# EAGLE board power_layout (EAGLE 9.6.2)
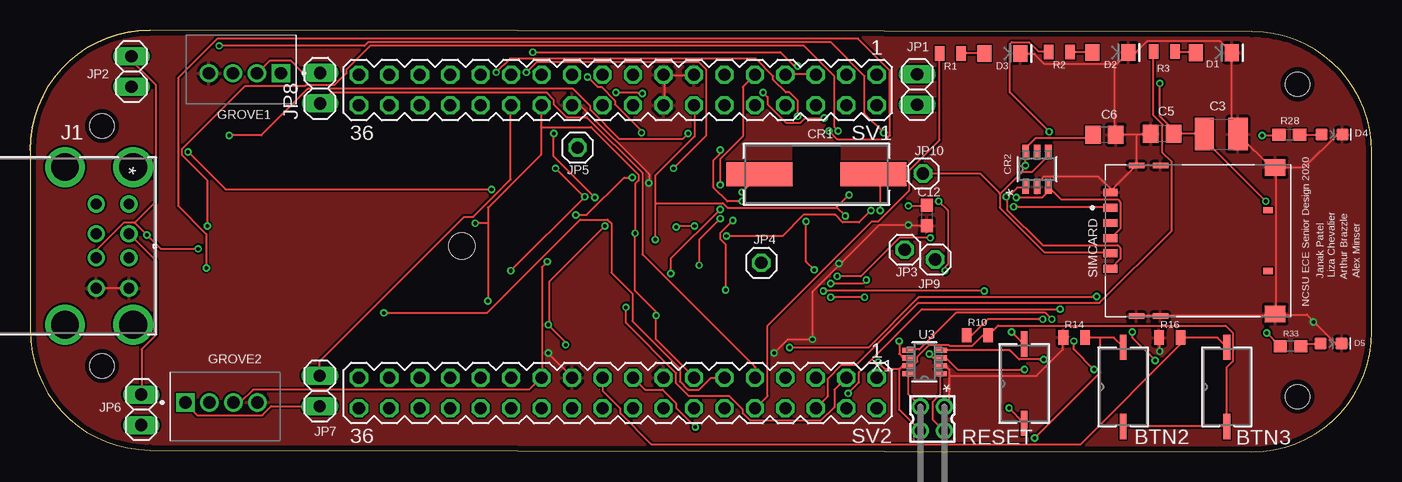
[diagram p0: board, top side]
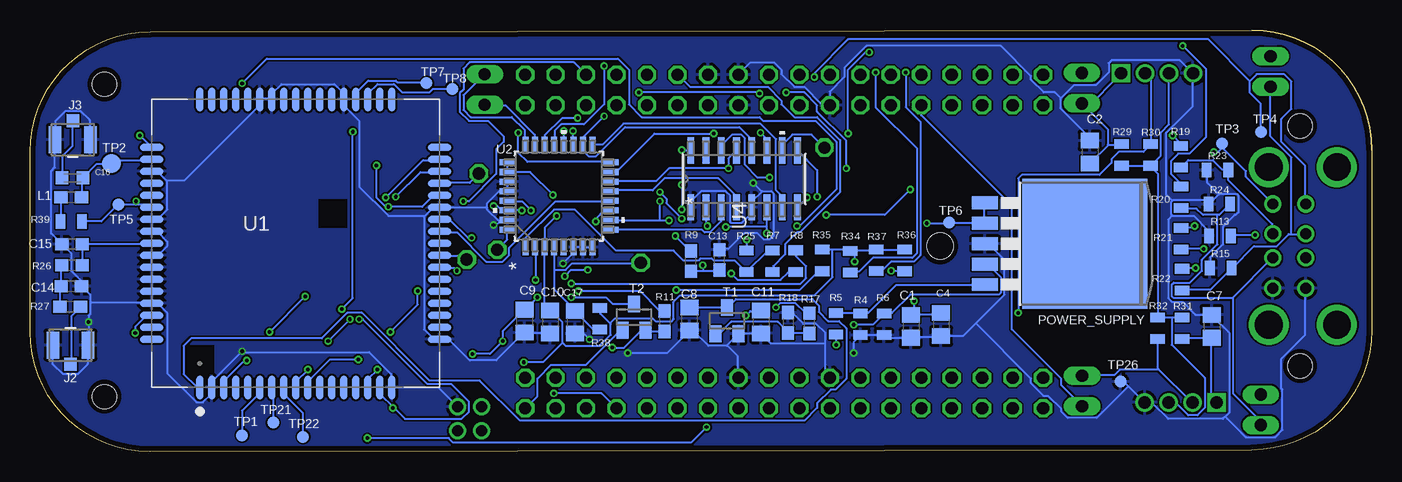
[diagram p1: board, bottom side, seen from below]

Size 111.87 x 35.15 mm. Coordinates in mm from the lower left corner, seen from the top.
Outline: 0,25.15 arc-90 10,35.15
Outline: 0,25.15 0,10.15 arc90 10,0.15 101.87,0 arc90 111.87,10 111.87,25 arc90 101.87,35 10,35.15
Outline: 10,35.15 arc90 0,25.15
Copper layers (1*16): Top 0.035mm / dielectric 1.5mm / Bottom 0.035mm
Design rules "NOA Eagle Rule 2016-06-12": minimum track width 6mil, minimum drill 0.3mm, track to track 6mil, track to pad 6mil, pad to pad 6mil, via to via 6mil, smd to smd 0mil, copper to edge 0.4mm, drill to drill 10mil, minimum pad ring 10mil, minimum via ring 6mil, stop-mask expansion 2mil, vias tented up to drill 25mil, thermal gap 10mil
Net classes: 0 default: width 0.152 mm, drill 0.152 mm, clearance 0.152 mm; 1 POWER: width 0.152 mm, drill 0.152 mm, clearance 0.152 mm
Holes 2 mm at 105.66,4.6 105.66,30.63 6,27.15 6,7.15
Holes 2.2 mm at 36,17.15

## Footprints (pad centres in the part's own frame; a part is rotated, then mirrored left to right if it is on the bottom)
SW2_PTS636_SM25F_SMTR_LFS_CNK = smd 2.108 x 0.559: 1 -3.301,0; 2 3.301,0
C0805 = smd 1.3 x 1.5: 1 -0.95,0; 2 0.95,0
C1210 = smd 1.6 x 2.7: 1 -1.4,0; 2 1.4,0
C0603 = smd 1.1 x 1: 1 -0.85,0; 2 0.85,0
C0603K = smd 1.05 x 1.08: 1 -0.875,0; 2 0.875,0
CRYSTAL_TXC_9C_TXC = smd 5.512 x 2.007: 1 -4.75,0; 2 4.75,0
SOT23-6L_STM-M = smd 1.181 x 0.559: 1 -1.467,0.95; 2 -1.467,0; 3 -1.467,-0.95; 4 1.467,-0.95; 5 1.467,0; 6 1.467,0.95
LED-1206 = smd 1.2 x 1.4: A -1.5,0; C 1.5,0
LED-0603 = smd 1 x 1: A -0.877,0; C 0.877,0
TE_640456-4 = drill 1.02 pad 1.37 square: 1 0,0 | drill 1.02 pad 1.37: 2 -2,0; 3 -4,0; 4 -6,0
CONN_AU-Y1008-2_ASM = drill 0.914 pad 1.422: 1 0,0; 2 2.489,0; 3 4.496,0; 4 7.01,0; 5 0,-2.718; 6 2.489,-2.718; 7 4.496,-2.718; 8 7.01,-2.718 | drill 2.311 pad 2.311: 9 -3.073,-5.334; 10 10.058,-5.334; 11 -3.073,0.356; 12 10.058,0.356
CONN_-SMT-1(01) = smd 1.041 x 2.261: 1 -1.47,0; 2 1.47,0 | smd 1.041 x 1.092: 3 0,-1.596
1X02 = drill 1.016 long: 1 -1.27,0; 2 1.27,0
1X01 = drill 1.016 octagon: 1 0,0
C1608 = smd 1.1 x 1: 1 -0.85,0; 2 0.85,0
TO263-5 = smd 1.067 x 2.159: 1 -3.404,-5.791; 2 -1.702,-5.791; 3 0,-5.791; 4 1.702,-5.791; 5 3.404,-5.791 | smd 10.8 x 10.41: 6 0,2.54
0805 = smd 0.8 x 1.2: 1 -0.9,0; 2 0.9,0
0603 = smd 1.1 x 1: 1 -0.85,0; 2 0.85,0
MOLEX_78646-3001 = smd 1.15 x 0.65: C1 -7.295,2.755; C2 -7.295,0.215; C3 -7.295,-2.325; C5 -7.295,4.025; C6 -7.295,1.485; C7 -7.295,-1.055 | smd 1.3 x 0.45: G1 -5.125,6.27; G2 -3.125,6.27; G3 -5.125,-6.27; G4 -3.125,-6.27 | smd 1.7 x 1.4: G5 6.435,-6.105; G6 6.435,6.105 | smd 0.8 x 0.54: X1 5.855,2.54; X2 5.855,-2.54
MA18-2 = drill 1.016 octagon: 1 -21.59,-1.27; 2 -21.59,1.27; 3 -19.05,-1.27; 4 -19.05,1.27; 5 -16.51,-1.27; 6 -16.51,1.27; 7 -13.97,-1.27; 8 -13.97,1.27; 9 -11.43,-1.27; 10 -11.43,1.27; 11 -8.89,-1.27; 12 -8.89,1.27; 13 -6.35,-1.27; 14 -6.35,1.27; 15 -3.81,-1.27; 16 -3.81,1.27; 17 -1.27,-1.27; 18 -1.27,1.27; 19 1.27,-1.27; 20 1.27,1.27; 21 3.81,-1.27; 22 3.81,1.27; 23 6.35,-1.27; 24 6.35,1.27; 25 8.89,-1.27; 26 8.89,1.27; 27 11.43,-1.27; 28 11.43,1.27; 29 13.97,-1.27; 30 13.97,1.27; 31 16.51,-1.27; 32 16.51,1.27; 33 19.05,-1.27; 34 19.05,1.27; 35 21.59,-1.27; 36 21.59,1.27
SOT23 = smd 1 x 1.4: 1 -0.95,-1.1; 2 0.95,-1.1; 3 0,1.1
TP10R = smd 1 x 1: TP 0,0
TP16R = smd 1.6 x 1.6: TP 0,0
SIMCON_SIM7000E = smd 2 x 0.6: 1 -12,8; 2 -12,7; 3 -12,6; 4 -12,5; 5 -12,4; 6 -12,3; 7 -12,2; 8 -12,1; 9 -12,0; 10 -12,-1; 11 -12,-2; 12 -12,-3; 13 -12,-4; 14 -12,-5; 15 -12,-6; 16 -12,-7; 17 -12,-8; 35 12,-8; 36 12,-7; 37 12,-6; 38 12,-5; 39 12,-4; 40 12,-3; 41 12,-2; 42 12,-1; 43 12,0; 44 12,1; 45 12,2; 46 12,3; 47 12,4; 48 12,5; 49 12,6; 50 12,7; 51 12,8 | smd 0.6 x 2: 18 -8,-12; 19 -7,-12; 20 -6,-12; 21 -5,-12; 22 -4,-12; 23 -3,-12; 24 -2,-12; 25 -1,-12; 26 0,-12; 27 1,-12; 28 2,-12; 29 3,-12; 30 4,-12; 31 5,-12; 32 6,-12; 33 7,-12; 34 8,-12; 52 8,12; 53 7,12; 54 6,12; 55 5,12; 56 4,12; 57 3,12; 58 2,12; 59 1,12; 60 0,12; 61 -1,12; 62 -2,12; 63 -3,12; 64 -4,12; 65 -5,12; 66 -6,12; 67 -7,12; 68 -8,12
VF32_TEX = smd 1.359 x 0.508: 1 -4.274,2.8; 2 -4.274,2; 3 -4.274,1.2; 4 -4.274,0.4; 5 -4.274,-0.4; 6 -4.274,-1.2; 7 -4.274,-2; 8 -4.274,-2.8; 17 4.274,-2.8; 18 4.274,-2; 19 4.274,-1.2; 20 4.274,-0.4; 21 4.274,0.4; 22 4.274,1.2; 23 4.274,2; 24 4.274,2.8 | smd 0.508 x 1.359: 9 -2.8,-4.274; 10 -2,-4.274; 11 -1.2,-4.274; 12 -0.4,-4.274; 13 0.4,-4.274; 14 1.2,-4.274; 15 2,-4.274; 16 2.8,-4.274; 25 2.8,4.274; 26 2,4.274; 27 1.2,4.274; 28 0.4,4.274; 29 -0.4,4.274; 30 -1.2,4.274; 31 -2,4.274; 32 -2.8,4.274
21-0078H = smd 0.978 x 0.432: 1 -1.365,0.975; 2 -1.365,0.325; 3 -1.365,-0.325; 4 -1.365,-0.975; 5 1.365,-0.975; 6 1.365,-0.325; 7 1.365,0.325; 8 1.365,0.975
D16_TEX = smd 2.184 x 0.559: 1 -2.362,4.445; 2 -2.362,3.175; 3 -2.362,1.905; 4 -2.362,0.635; 5 -2.362,-0.635; 6 -2.362,-1.905; 7 -2.362,-3.175; 8 -2.362,-4.445; 9 2.362,-4.445; 10 2.362,-3.175; 11 2.362,-1.905; 12 2.362,-0.635; 13 2.362,0.635; 14 2.362,1.905; 15 2.362,3.175; 16 2.362,4.445
332-04 = drill 0.9 pad 1.27: 1 -1,-1; 2 -1,1; 3 1,-1; 4 1,1

## Placement (x,y rotation side)
BTN2  PTS636SM25F  [SW2_PTS636_SM25F_SMTR_LFS_CNK]  91.14,5.41 90 top
BTN3  PTS636SM25F  [SW2_PTS636_SM25F_SMTR_LFS_CNK]  99.77,5.41 90 top
C1  100uF  [C0805]  38.44,10.46 270 bottom
C2  0.1uF  [C0805]  23.52,24.99 270 bottom
C3  330uF  [C1210]  99.31,26.48 0 top
C4  1uF  [C0805]  35.92,10.61 270 bottom
C5  100nF  [C0805]  94.37,26.5 180 top
C6  .1uF  [C0805]  89.56,26.44 0 top
C7  0.1uF  [C0805]  13.36,10.46 270 bottom
C8  .1uF  [C0805]  56.91,11.07 270 bottom
C9  .1uF  [C0805]  70.64,10.89 270 bottom
C10  .1uF  [C0805]  68.5,10.81 270 bottom
C11  .1uF  [C0805]  50.92,10.82 270 bottom
C12  27pF  [C0603]  74.75,19.69 270 top
C13  27pF  [C0603]  54.38,16 90 bottom
C14  27pF  [C0603]  108.43,13.81 0 bottom
C15  27pF  [C0603]  108.36,17.3 180 bottom
C16  33pF  [C0603K]  108.33,22.83 0 bottom
C17  3uF  [C0805]  66.45,10.79 270 bottom
CR1  9C-6.000MAAJ-T  [CRYSTAL_TXC_9C_TXC]  65.56,23.13 180 top
CR2  ESDA6V1-5SC6SOT23-6L_STM-M  [SOT23-6L_STM-M]  83.95,23.55 90 top
D1  RED  [LED-1206]  98.69,33.26 0 top
D2  GREEN  [LED-1206]  90.06,33.28 0 top
D3  BLUE  [LED-1206]  81.06,33.2 0 top
D4  Yellow  [LED-0603]  108.53,26.44 0 top
D5  Yellow  [LED-0603]  108.46,9.02 0 top
GROVE1  640456-4  [TE_640456-4]  20.91,31.54 0 top
GROVE2  640456-4  [TE_640456-4]  12.95,4.11 180 top
J1  AU-Y1008-2  [CONN_AU-Y1008-2_ASM]  8.25,20.65 270 top
J2  U.FL-R-SMT-1(01)  [CONN_-SMT-1(01)]  108.5,8.89 0.1 bottom
J3  U.FL-R-SMT-1(01)  [CONN_-SMT-1(01)]  108.31,26.01 179.8 bottom
JP1  [1X02]  73.96,30.2 90 top
JP2  [1X02]  8.46,31.7 90 top
JP3  [1X01]  72.92,16.84 0 top
JP4  [1X01]  60.96,15.75 0 top
JP5  [1X01]  45.64,25.35 0 top
JP6  [1X02]  9.27,3.51 270 top
JP7  [1X02]  24.16,5.08 90 top
JP8  [1X02]  24.18,30.3 90 top
JP9  [1X01]  75.46,16.03 0 top
JP10  [1X01]  74.45,23.19 0 top
L1  47nH  [C1608]  108.43,21.23 0 bottom
POWER_SUPPLY  MIC29302WU  [TO263-5]  26.47,17.34 270 bottom
R1  60.4  [0805]  76.73,33.2 180 top
R2  180  [0805]  85.82,33.31 180 top
R3  180  [0805]  94.57,33.37 180 top
R4  47k  [0805]  42.64,10.63 90 bottom
R5  100k  [0805]  44.68,10.67 270 bottom
R6  1500  [0805]  40.68,10.63 90 bottom
R7  27  [0805]  49.98,15.87 90 bottom
R8  27  [0805]  48.04,15.9 90 bottom
R9  1.5k  [0603]  56.79,15.89 90 bottom
R10  4700  [0805]  78.97,9.71 0 top
R11  47k  [0603]  58.97,10.89 270 bottom
R13  15k  [0805]  12.67,18 0 bottom
R14  4700  [0805]  87.04,9.54 0 top
R15  15k  [0805]  12.62,15.31 0 bottom
R16  4700  [0805]  95.02,9.53 0 top
R17  4.7k  [0603]  46.9,10.7 90 bottom
R18  47k  [0603]  48.68,10.76 270 bottom
R19  27  [0805]  15.93,24.59 90 bottom
R20  27  [0805]  15.9,21.21 90 bottom
R21  27  [0805]  15.9,17.76 270 bottom
R22  27  [0805]  15.83,14.35 270 bottom
R23  15k  [0805]  12.87,23.48 0 bottom
R24  15k  [0805]  12.72,20.64 0 bottom
R25  1.5k  [0805]  52.14,15.87 90 bottom
R26  0  [0603]  108.37,15.55 0 bottom
R27  0  [0603]  108.52,12.07 180 bottom
R28  330  [0603]  104.98,26.42 180 top
R29  4700  [0805]  20.88,24.74 270 bottom
R30  4700  [0805]  18.44,24.74 270 bottom
R31  4700  [0805]  15.82,10.29 90 bottom
R32  4700  [0805]  17.88,10.29 90 bottom
R33  330  [0603]  105.08,8.81 180 top
R34  15k  [0805]  43.48,15.85 90 bottom
R35  15k  [0805]  45.82,15.95 90 bottom
R36  15k  [0805]  38.96,15.95 270 bottom
R37  15k  [0805]  41.33,15.98 270 bottom
R38  45k  [0805]  64.36,11.1 270 bottom
R39  10  [0805]  108.43,19.2 0 bottom
RESET  PTS636SM25F  [SW2_PTS636_SM25F_SMTR_LFS_CNK]  82.88,5.69 90 top
SIMCARD  78646-3001  [MOLEX_78646-3001]  97.36,17.59 0 top
SV1  [MA18-2]  49,30.15 180 top
SV2  [MA18-2]  49,4.9 180 top
T1  BCX70SMD  [SOT23]  53.77,10.93 0 bottom
T2  BCX70SMD  [SOT23]  61.52,11.23 0 bottom
TP1  TPTP10R  [TP10R]  94.2,1.37 0 bottom
TP2  TPTP16R  [TP16R]  105.07,24.04 0 bottom
TP3  TPTP10R  [TP10R]  12.5,25.7 0 bottom
TP4  TPTP10R  [TP10R]  9.25,26.67 0 bottom
TP5  TPTP10R  [TP10R]  104.5,20.6 0 bottom
TP6  TPTP10R  [TP10R]  35.26,19.1 0 bottom
TP7  TPTP10R  [TP10R]  78.82,30.73 0 bottom
TP8  TPTP10R  [TP10R]  76.68,30.25 0 bottom
TP21  TPTP10R  [TP10R]  91.59,2.44 0 bottom
TP22  TPTP10R  [TP10R]  89.1,1.24 0 bottom
TP26  TPTP10R  [TP10R]  20.95,5.84 0 bottom
U1  SIM7000E  [SIMCON_SIM7000E]  89.72,17.36 90 bottom
U2  TUSB2046BVFR  [VF32_TEX]  67.77,21.32 90 bottom
U3  MAX3373EEKA+T  [21-0078H]  74.57,7.49 180 top
U4  TPS2044BDR  [D16_TEX]  52.34,22.74 90 bottom
X1  332-04  [332-04]  75.23,2.75 0 top

## Library data of the parts
BTN2 BTN3 RESET = Personal
C1-C17 L1 = rcl; SPICEPREFIX: C
CR1 = Personal; BUILT_BY: EMA_UL_Team; MANUFACTURER_PART_NUMBER: 9C-6.000MAAJ-T; SOURCELIBRARY: TXC_2011-01-01_CRYSTAL_9C; VENDOR: TXC
CR2 = Personal; BUILT_BY: EMA_UL_Team; MANUFACTURER_PART_NUMBER: ESDA6V1-5SC6; SOURCELIBRARY: Update_database_2020-10-15; VENDOR: STMicroelectronics
D1 = SparkFun-LED; PROD_ID: DIO-09912
D2 = SparkFun-LED; PROD_ID: DIO-00862
D3 = SparkFun-LED; PROD_ID: DIO-09911
D4 D5 = SparkFun-LED; PROD_ID: DIO-09003
GROVE1 GROVE2 = 640456-4; CENTERLINE_PITCH: 2.54 mm[.1 in]; COMMENT: 640456-4; DESCRIPTION: Header, Friction Lock; MTA-100; 4; 250 VAC; Polyester; Tin; Copper Alloy; Tin; DIGI-KEY_PART_NUMBER: A1922-ND; DIGI-KEY_PURCHASE_URL: https://www.digikey.com/product-detail/en/te-connectivity-amp-connectors/640456-4/A1922-ND/109006?utm_source=snapeda&utm_medium=aggregator&utm_campaign=symbol; EU_ROHS_COMPLIANCE: Compliant; MF: TE Connectivity; MP: 640456-4; NUMBER_OF_POSITIONS: 4; PACKAGE: None; PRODUCT_TYPE: Connector; TE_PURCHASE_URL: https://www.te.com/usa-en/product-640456-4.html?te_bu=Cor&te_type=disp&te_campaign=seda_glo_cor-seda-global-disp-prtnr-fy19-seda-model-bom-cta_sma-317_1&elqCampaignId=32493
J1 = Personal; BUILT_BY: EMA_Cory; COPYRIGHT: Copyright (C) 2018 Accelerated Designs. All rights reserved; DATASHEET: http://www.assmann-wsw.com/fileadmin/datasheets/ASS_5780_CO.pdf; MANUFACTURER_PART_NUMBER: AU-Y1008-2; SOURCELIBRARY: Assmann_2020-03-30; VENDOR: Assmann
J2 J3 = Personal; BUILT_BY: EMA_Matt; COPYRIGHT: Copyright (C) 2018 Accelerated Designs. All rights reserved; MANUFACTURER_PART_NUMBER: U.FL-R-SMT-1(01); SOURCELIBRARY: Hirose_12_20_2019; VENDOR: Hirose
JP1-JP10 = pinhead
POWER_SUPPLY = MIC29302WU; AVAILABILITY: Unavailable; DESCRIPTION: Linear Voltage Regulator IC 1 Output 3A TO-263-5; MF: Microchip Technology; MP: MIC29302WU; PACKAGE: TO-263-6 Microchip Technology; PRICE: None
R1-R8 R10 R13-R16 R19-R25 R29-R32 R34-R39 = SparkFun-Resistors
R9 R26-R28 R33 = SparkFun-Resistors; PROD_ID: RES-07856
R11 R18 = SparkFun-Resistors; PROD_ID: RES-07871
R17 = SparkFun-Resistors; PROD_ID: RES-07857
SIMCARD = 78646-3001; AVAILABILITY: Unavailable; DESCRIPTION: 6 Position Card Connector Micro SIM Surface Mount, Right Angle Gold; MF: Molex; MP: 78646-3001; PACKAGE: None; PRICE: None
SV1 SV2 = con-lstb; OC_FARNELL: unknown; OC_NEWARK: unknown
T1 T2 = transistor
TP1-TP8 TP21 TP22 TP26 = testpad
U1 = SIM7000E; AVAILABILITY: Unavailable; DESCRIPTION: SIM7000E GSM/GPRS RF Arduino Platform Evaluation Expansion Board; MF: DFRobot; MP: SIM7000E; PACKAGE: Package Analog Devices; PRICE: None
U2 = Personal; BUILT_BY: EMA_UL_Team; COPYRIGHT: Copyright (C) 2018 Accelerated Designs. All rights reserved; MANUFACTURER: Texas Instruments; MANUFACTURER_PART_NUMBER: TUSB2046BVFR; SOURCELIBRARY: Texas_Instruments_2018-12-15; VENDOR: Texas Instruments
U3 = Personal; BUILT_BY: EMA_UL_Team; MANUFACTURER_PART_NUMBER: max3373eeka+t; SOURCELIBRARY: Maxim_2009-12-17_3a; VENDOR: Maxim Integrated Products
U4 = Personal; BUILT_BY: EMA_UL_Team; MANUFACTURER: Texas Instruments; MANUFACTURER_PART_NUMBER: TPS2044BDR; SOURCELIBRARY: TI_2014-06-19; VENDOR: Texas Instruments
X1 = con-garry

## Nets
0: R11.1 RESET.2
1.8V: C9.1 T2.3 U1.15 U3.3 U3.6
3.3V [POWER]: BTN2.1 BTN3.1 C10.1 GROVE1.3 GROVE2.3 R10.2 R25.2 R29.2 R30.2 R31.2 R32.2 R34.2 R35.2 R36.1 R37.1 R38.1 SV1.14 SV2.23 U2.3 U2.25 U2.26 U3.7 X1.1
5V [POWER]: C1.1 C4.1 C11.1 POWER_SUPPLY.1 POWER_SUPPLY.2 SV1.24 SV2.13 TP6.TP U4.2 U4.6
DM0: R8.1 SV1.9
DM4: JP1.1 U2.23
DP0: R7.1 SV1.11
DP4: JP1.2 U2.24
GND: C1.2 C2.1 C3.2 C4.2 C5.2 C6.2 C7.1 C8.2 C9.2 C10.2 C11.2 C12.2 C13.2 C14.2 C15.2 C17.2 CR2.2 D1.C D2.C D3.C D4.C D5.C GROVE1.4 GROVE2.4 J1.4 J1.8 J2.1 J2.2 J3.1 J3.2 POWER_SUPPLY.3 R4.1 R6.1 R13.1 R14.1 R15.1 R16.1 R18.1 R23.1 R24.1 SIMCARD.C5 SIMCARD.G1 SIMCARD.G2 SIMCARD.G3 SIMCARD.G4 SIMCARD.G5 SIMCARD.G6 SV1.13 SV1.15 SV1.16 SV1.22 SV2.15 SV2.21 T1.2 TP26.TP U1.2 U1.17 U1.18 U1.29 U1.39 U1.45 U1.46 U1.54 U1.58 U1.59 U1.61 U1.62 U1.63 U1.64 U1.65 U2.6 U2.7 U2.8 U2.27 U2.28 U2.31 U3.2 U4.1 U4.5 X1.4
I2C1_SCL: C2.2 GROVE1.1 JP8.1 R29.1 SV2.9
I2C1_SDA: GROVE1.2 JP8.2 R30.1 SV2.11
I2C2_SCL: C7.2 GROVE2.1 JP7.1 R31.1 SV1.28
I2C2_SDA: GROVE2.2 JP7.2 R32.1 SV1.26
LED1: R3.2 SV2.6
LED2: R2.2 SV2.8
LED3: R1.2 SV2.10
MODEM_D+: U1.27 U2.12
MODEM_D-: U1.28 U2.11
N$1: C6.1 CR2.6 SIMCARD.C1 U1.30
N$2: CR2.3 SIMCARD.C2 U1.33
N$3: POWER_SUPPLY.5 R4.2 R5.1
N$4: CR2.1 SIMCARD.C3 U1.32
N$5: D3.A R1.1
N$7: D2.A R2.1
N$8: D1.A R3.1
N$9: TP1.TP U1.6
N$10: R7.2 R25.1 U2.1
N$11: C14.1 R26.1 R27.2
N$12: R8.2 U2.2
N$13: U3.8 X1.2
N$14: C13.1 CR1.2 R9.1
N$15: C16.1 J3.3
N$16: R22.1 U2.19
N$18: R17.1 R18.2 T1.1
N$19: R19.2 U2.15
N$20: R20.2 U2.16
N$21: TP21.TP U1.7
N$22: R21.1 U2.20
N$23: C8.1 T1.3 U1.1
N$27: L1.1 R39.1
N$29: R28.2 U1.52
N$30: D4.A R28.1
N$32: TP22.TP U1.8
N$33: R33.2 U1.66
N$35: J2.3 R27.1
N$36: R11.2 T2.2 U1.3
N$37: D5.A R33.1
N$38: U3.1 X1.3
NRESET: R10.1 RESET.1 U1.16
OUT1: U4.15
OUT2: J1.1 TP3.TP U4.14
OUT3: J1.5 TP4.TP U4.11
OUT4: JP5.1 U4.10
OVRCUR1: R35.1 U2.10 U4.16
OVRCUR2: R34.1 U2.14 U4.13
OVRCUR3: R37.2 U2.18 U4.12
OVRCUR4: R36.2 U2.22 U4.9
PB2: BTN2.2 R14.2 SV2.17
PB3: BTN3.2 R16.2 SV2.19
PRE_ANT: C15.1 R26.2 U1.60
PRE_GPS: C16.2 L1.2 TP2.TP U1.53
PWRKEY: R17.2 SV2.3
PWRON1: U2.9 U4.3
PWRON2: U2.13 U4.4
PWRON3: U2.17 U4.7
PWRON4: U2.21 U4.8
REGULATED: C3.1 C5.1 POWER_SUPPLY.4 R5.2 R6.2 R39.2 TP5.TP U1.55 U1.56 U1.57
RESET: C17.1 JP4.1 R38.2 U2.4
RXD: U1.10 U3.4
SIM_DATA: CR2.4 JP10.1 SIMCARD.C7 U1.31
SIMC_ADC: JP9.1 U1.25
SIMC_I2C_SCL: TP7.TP U1.38
SIMC_I2C_SDA: TP8.TP U1.37
SLEEP: SV2.2 T2.1
SUSPEND: JP3.1 U2.32
TXD: U1.9 U3.5
USB1_D+: J1.3 JP6.2 R20.1 R24.2
USB1_D-: J1.2 JP6.1 R19.1 R23.2
USB2_D+: J1.7 JP2.2 R13.2 R21.2
USB2_D-: J1.6 JP2.1 R15.2 R22.2
USB_VBUS: SV1.5 SV1.7 U1.24
VPP: SIMCARD.C6
XTAL1: C12.1 CR1.1 U2.30
XTAL2: R9.2 U2.29

## Tracks (layer width: path | path; a pad name or v marks a point on that pad's centre or on a via)
0  (via drill 0.3)
  Top 0.152: v79.55,13.41 v66.14,13.41 | v81.84,9.98 82.83,8.99 RESET.2
  Bottom 0.152: v66.14,13.41 61.04,13.41 59.44,11.81 58.98,11.81 R11.1 | v79.55,13.41 79.55,12.27 v81.84,9.98
1.8V  (via drill 0.3)
  Top 0.152: v72.47,9.22 72.47,8.15 72.77,7.85 73.15,7.85 U3.6 | v74.98,8.15 75.29,7.85 75.89,7.85 U3.3 75.97,7.77 76.43,7.77 77.34,6.86 v82.91,6.86 | v69.57,12.88 v66.75,12.88
  Bottom 0.152: v74.98,8.15 73.53,8.15 v72.47,9.22 72.47,10.06 70.71,11.81 C9.1 70.64,11.81 v69.57,12.88 | v66.75,12.88 63.86,12.88 63.32,12.34 61.57,12.34 T2.3 | v82.91,6.86 83.67,6.1 83.67,5.41 U1.15
3.3V  (via drill 0.3)
  Top 0.152: BTN2.1 91.14,2.13 99.75,2.13 BTN3.1 99.75,2.21 99.75,7.01 100.28,7.54 100.28,9.91 99.67,10.52 80.7,10.52 79.93,9.75 R10.2 79.86,9.68 79.4,9.68 78.56,8.84 76.66,8.84 76.58,8.92 74.98,8.92 73.99,7.92 73.99,7.54 73.69,7.24 73.23,7.24 U3.7 73.15,7.16 72.77,7.16 72.5,6.9 | 72.5,6.9 72.47,6.86 72.47,3.51 74.22,1.75 X1.1 | v43.13,15.85 42.67,15.39 42.67,6.25 SV2.23 42.6,6.17 41.6,5.18 18.59,5.18 17.53,4.11 16.99,4.11 GROVE2.3 | 52.12,20.73 52.12,23.01 55.4,26.29 55.4,28.88 SV1.14 | 52.12,20.73 v52.12,17.68 | 67.25,20.38 67.21,20.35 58.14,20.35 57.76,20.73 52.12,20.73 | 67.25,20.38 v68.28,21.41 | 67.25,20.38 v67.97,19.66 | v70.71,7.47 71.25,6.93 72.47,6.93 72.5,6.9
  Bottom 0.152: 16.69,11.2 17.83,11.2 R32.2 17.83,11.28 17.83,23.16 18.44,23.77 R30.2 | 16.69,11.2 15.85,11.2 R31.2 | R30.2 R29.2 | 16.69,11.2 16.69,8.92 13.95,6.17 13.95,3.66 14.55,3.05 15.32,3.05 16.31,4.04 16.92,4.04 GROVE2.3 | R30.2 17.6,24.69 17.6,26.59 16.92,27.28 16.92,31.47 GROVE1.3 | 43.13,16.76 41.45,16.76 41.38,16.84 R37.1 41.3,16.84 39.01,16.84 R36.1 | 43.13,16.76 43.43,16.76 R34.2 | 44.96,16.84 43.43,16.84 R34.2 | 44.96,16.84 45.8,16.84 R35.2 | 43.13,16.76 v43.13,15.85 | 43.13,16.76 R34.2 | 63.51,10.71 63.48,10.67 63.48,9.75 64.39,8.84 67.21,8.84 67.47,9.11 | 63.51,10.71 64.31,11.51 64.31,11.96 R38.1 | 67.47,9.11 67.51,9.14 67.51,10.82 68.43,11.73 C10.1 68.5,11.81 68.96,12.27 68.96,16.99 U2.3 68.96,17.07 68.96,18.67 v67.97,19.66 | U2.25 72.08,24.08 72.08,23.32 U2.26 70.18,23.32 v68.28,21.41 | v52.12,17.68 52.12,16.84 R25.2 | 44.96,16.84 44.96,14.55 46.48,13.03 57.68,13.03 58.22,12.5 58.22,11.05 58.37,10.9 59.74,10.9 59.97,11.13 63.09,11.13 63.51,10.71 | v70.71,7.47 69.11,7.47 67.47,9.11
5V  (via drill 0.3)
  Top 0.152: SV2.13 55.32,6.25 52.2,9.37 v52.2,11.35 52.2,11.66 50.44,13.41 v50.44,18.21 50.44,22.33 50.75,22.63 50.75,23.09 46.79,27.05 42.6,27.05 | v55.4,18.82 53.95,18.82 v53.87,18.75 | 38.18,19.05 38.18,20.35 42.6,24.77 42.6,27.05 | 38.18,19.05 v38.18,12.57 | 42.6,27.05 42.6,28.88 SV1.24 | 38.18,19.05 v37.11,19.05
  Bottom 0.152: v52.2,11.35 51.82,11.73 50.98,11.73 C11.1 | v50.44,18.21 50.44,18.75 | 50.44,18.75 50.44,20.35 U4.6 | v55.4,18.82 55.47,18.9 55.47,20.35 U4.2 | 50.44,18.75 v53.87,18.75 | POWER_SUPPLY.1 32.31,20.73 32.31,19.13 POWER_SUPPLY.2 32.31,19.05 35.2,19.05 TP6.TP 35.28,19.05 v37.11,19.05 | 38.18,11.43 36.04,11.43 35.97,11.51 C4.1 | 38.18,11.43 38.41,11.43 C1.1 38.18,11.43 | v38.18,12.57 38.18,11.43
DM0  (via drill 0.3)
  Top 0.152: v53.42,14.86 53.42,16.08 v57.53,20.19 | v57.53,22.25 57.53,24.38 59.44,26.29 59.44,30.4 60.43,31.39 SV1.9
  Bottom 0.152: v53.42,14.86 52.88,14.33 49.3,14.33 48.69,14.94 48.08,14.94 R8.1 | v57.53,22.25 v57.53,20.19
DM4
  Bottom 0.152: U2.23 69.8,25.6 69.8,26.44 72.24,28.88 73.91,28.88 JP1.1
DP0
  Bottom 0.152: R7.1 49.91,15.01 49.91,15.47 48.92,16.46 48.92,17.3 47.93,18.29 47.7,18.29 44.35,21.64 44.35,25.98 46.25,27.89 48.16,27.89 49.23,28.96 49.23,29.26 50.37,30.4 56.84,30.4 57.84,31.39 SV1.11
DP4
  Bottom 0.152: U2.24 70.64,25.6 70.64,26.82 71.7,27.89 75.13,27.89 75.74,28.5 75.74,29.72 73.99,31.47 JP1.2
GND  (via drill 0.3)
  Top 0.152: 90.45,32.31 90.6,32.31 91.52,33.22 D2.C 91.59,33.3 92.2,33.3 93.12,34.21 99.21,34.21 100.13,33.3 D1.C 100.2,33.22 100.2,26.97 100.66,26.52 C3.2 100.74,26.44 103.48,23.7 103.78,23.7 SIMCARD.G6 | 90.45,32.31 84.58,32.31 83.74,33.15 82.6,33.15 D3.C | 92.28,26.44 93.42,26.44 C5.2 | 92.28,26.44 C6.2 90.45,26.44 90.45,32.31 | SIMCARD.G1 92.2,23.85 90.14,21.79 90.14,21.64 SIMCARD.C5 90.14,21.87 89.08,22.94 84.51,22.94 83.97,22.4 83.97,22.1 CR2.2 | SIMCARD.G2 94.18,23.93 92.28,23.93 SIMCARD.G1 | 92.28,26.44 92.28,24 SIMCARD.G1 | SIMCARD.G3 92.28,11.35 94.18,11.35 SIMCARD.G4 94.26,11.35 103.86,11.35 SIMCARD.G5 | 107.02,10.86 106.45,11.43 103.86,11.43 SIMCARD.G5 | 107.02,10.86 108.81,9.07 109.27,9.07 D5.C | D4.C 108.97,26.44 106.22,23.7 103.86,23.7 SIMCARD.G6 | SIMCARD.G5 103.86,11.51 103.86,23.62 SIMCARD.G6 | C12.2 74.68,18.9 v73.23,18.9 70.79,18.9 67.55,15.66 | 67.55,15.66 65.23,13.34 v65.23,9.37 63.17,9.37 v62.03,8.23 | v67.44,15.7 67.51,15.7 67.55,15.66 | 76.66,6.32 76.66,4.19 76.28,3.81 X1.4 | 76.66,6.32 76.66,6.86 76.35,7.16 75.97,7.16 U3.2 | 76.66,6.32 83.9,6.32 86.11,8.53 86.11,9.53 R14.1 | v94.18,8.38 94.18,9.53 R16.1 | v106.98,10.82 107.02,10.86 | SV1.16 52.88,28.96 52.88,31.39 SV1.15 52.96,31.39 55.32,31.39 SV1.13 | v51.59,22.4 51.59,23.16 45.87,28.88 45.26,28.88 SV1.22 | J1.8 5.56,13.64 8.23,13.64 J1.4 | v43.2,8.23 45.19,6.25 SV2.21
  Bottom 0.152: C10.2 68.5,9.91 70.64,9.91 C9.2 70.71,9.91 73,7.62 75.21,7.62 76.89,9.3 77.65,9.3 U1.18 78.18,9.37 79.02,10.21 79.02,19.58 78.98,19.62 | U2.8 65,17.07 65.76,17.07 U2.7 65.84,17.07 66.52,17.07 U2.6 66.6,16.99 66.6,16.54 v67.44,15.7 | U2.27 72.08,22.48 72.08,21.79 U2.28 72.16,21.79 72.69,21.79 73.76,20.73 73.76,20.35 | v73.23,18.9 73,18.9 72.73,19.16 | 72.73,19.16 72.62,19.28 72.08,19.28 U2.31 | v65.23,9.37 65.68,9.83 66.45,9.83 C17.2 | 73.76,20.35 73.76,20.19 72.73,19.16 | 73.76,20.35 77.65,20.35 U1.29 77.72,20.35 78.26,20.35 78.98,19.62 | J3.1 106.91,26.06 106.91,27.66 107.67,28.42 108.89,28.42 109.73,27.58 109.73,26.06 J3.2 109.8,25.98 109.8,23.7 110.11,23.39 110.11,18.21 109.27,17.37 C15.2 109.19,17.3 108.43,16.54 108.43,15.09 107.59,14.25 107.59,13.87 C14.2 107.52,13.79 106.83,13.11 106.83,12.42 | 106.83,12.42 106.83,11.51 106.98,11.35 v106.98,10.82 106.98,8.92 J2.2 107.06,8.84 107.06,7.32 107.9,6.48 109.12,6.48 109.96,7.32 109.96,8.84 J2.1 | X1.4 76.28,3.81 77.8,5.33 81.69,5.33 U1.17 81.76,5.41 81.76,6.48 83.59,8.31 94.18,8.31 v94.18,8.38 96.7,5.87 96.7,5.41 U1.2 96.77,5.33 96.77,4.8 97.46,4.11 97.99,4.11 100.43,6.55 100.43,11.58 101.19,12.34 101.65,12.34 U1.65 | U1.65 101.73,12.42 101.73,13.34 U1.64 101.73,13.41 101.73,14.33 U1.63 101.73,14.4 101.73,15.32 U1.62 101.73,15.39 101.73,16.31 U1.61 101.65,16.38 101.19,16.38 100.43,17.15 100.43,17.53 101.19,18.29 101.65,18.29 U1.59 U1.58 101.65,19.43 101.19,19.43 100.43,20.19 100.43,22.56 100.47,22.59 | 100.47,22.59 101.19,23.32 101.65,23.32 U1.54 | 100.47,22.59 100.43,22.63 98.98,22.63 92.73,28.88 92.73,29.34 U1.46 92.66,29.41 91.75,29.41 U1.45 91.67,29.41 91.67,29.87 90.91,30.63 86.49,30.63 85.72,29.87 85.72,29.41 U1.39 85.65,29.34 85.65,28.8 84.43,27.58 84.43,22.1 81.99,19.66 79.02,19.66 78.98,19.62
  Bottom 0.152: 106.83,12.42 101.8,12.42 U1.65 | 50.86,21.68 51.66,20.88 51.66,20.42 U4.5 51.74,20.35 51.74,19.89 52.58,19.05 53.42,19.05 53.49,19.13 53.49,21.34 53.87,21.72 55.93,21.72 56.77,20.88 56.77,20.42 U4.1 | 50.86,21.68 50.83,21.72 50.06,21.72 49.91,21.56 49.91,17.98 50.22,17.68 50.67,17.68 51.21,18.21 52.35,18.21 53.65,16.92 54.33,16.92 C13.2 | SV1.15 52.81,31.47 51.82,32.46 49.84,32.46 49.23,31.85 49.23,31.47 48.16,30.4 47.32,30.4 45.87,28.96 45.26,28.96 SV1.22 45.19,28.96 45.19,30.02 43.97,31.24 43.97,32 42.14,33.83 30.94,33.83 28.42,31.32 28.42,31.01 27.36,29.95 26.44,29.95 25.95,29.45 | v51.59,22.4 50.86,21.68 | 45.57,9.07 45.57,6.55 45.26,6.25 SV2.21 | 45.57,9.07 45.57,9.91 46.33,10.67 47.4,10.67 48.31,11.58 48.62,11.58 R18.1 | 53.76,8.88 52.88,9.75 T1.2 52.81,9.83 50.98,9.83 C11.2 50.9,9.83 50.14,9.07 45.57,9.07 | 53.76,8.88 53.8,8.84 55.32,8.84 56.54,10.06 56.84,10.06 C8.2 56.92,10.06 58.75,8.23 v62.03,8.23 | 53.76,8.88 52.88,8 52.88,6.25 SV2.15 | 33.03,10.71 34.06,9.68 35.89,9.68 C4.2 35.97,9.6 38.48,9.6 C1.2 38.48,9.53 40.46,9.53 40.62,9.68 R6.1 40.69,9.75 42.6,9.75 R4.1 42.67,9.68 43.2,9.14 v43.2,8.23 | 33.03,10.71 30.63,13.11 30.63,16 31.93,17.3 32.23,17.3 POWER_SUPPLY.3 | 25.95,29.45 24.84,30.56 23.01,30.56 21.95,31.62 21.95,32.39 21.72,32.61 16,32.61 14.94,31.55 GROVE1.4 14.94,31.47 14.94,28.8 17.14,26.59 17.14,21.41 16.65,20.92 | 25.95,29.45 25.98,29.41 25.98,28.65 23.55,26.21 23.55,25.98 C2.1 | 20.31,5.45 18.97,4.11 GROVE2.4 18.9,4.04 18.29,4.04 16.99,2.74 12.42,2.74 12.23,2.93 | 20.31,5.45 20.65,5.79 20.95,5.79 TP26.TP
  Bottom 0.152: 12.76,21.45 13.56,20.65 R24.1 13.64,20.65 13.95,20.96 16.61,20.96 16.65,20.92 | 12.76,21.45 12.72,21.49 11.28,21.49 11.12,21.34 11.12,19.96 11.35,19.74 11.43,19.74 12.42,18.75 12.42,17.3 13.49,16.23 13.49,15.32 R15.1 | 16.65,19.7 16.76,19.81 16.76,20.8 16.65,20.92 | 16.65,19.7 16.61,19.66 14.86,19.66 13.64,18.44 13.64,18.06 R13.1 | 12.76,21.45 13.72,22.4 13.72,23.47 R23.1 | 16.65,19.7 16.99,19.35 16.99,12.8 16.69,12.5 15.77,12.5 14.71,11.43 13.41,11.43 C7.1 13.34,11.35 11.89,9.91 11.89,3.28 12.23,2.93 | 12.23,2.93 10.52,1.22 8.08,1.22 7.47,1.83 7.47,5.18 7.54,5.26 7.54,7.77 5.56,9.75 5.56,13.64 J1.8 | 33.03,10.71 28.42,6.1 28.42,5.72 27.36,4.65 26.98,4.65 25.91,3.58 25.91,3.35 25.38,2.82 22.94,2.82 20.31,5.45
  pour Top: -4.29,36.98 114.17,36.98 114.17,-4.8 -4.29,-4.8
  pour Bottom (rank 4): -5.03,36.94 113.68,36.94 113.68,-1.24 -5.03,-1.24 -5.03,36.94 -5.03,36.94
I2C1_SCL
  Top 0.152: SV2.9 60.43,6.25 60.43,7.09 51.05,16.46 51.05,23.24 46.41,27.89 44.73,27.89 43.66,28.96 43.66,29.34 43.05,29.95 25.15,29.95 24.23,29.03 JP8.1
  Bottom 0.152: 21.98,25.57 23.47,24.08 C2.2 | 21.98,25.57 21.95,25.6 20.88,25.6 R29.1 | 23.77,28.65 24.16,29.03 JP8.1 23.77,28.65 | 23.77,28.65 22.02,26.9 22.02,25.6 21.98,25.57 | 23.77,28.65 20.95,31.47 GROVE1.1
I2C1_SDA  (via drill 0.3)
  Top 0.152: JP8.2 24.16,31.62 22.71,31.62 21.72,32.61 20.04,32.61 18.97,31.55 GROVE1.2 | v29.49,11.58 38.1,11.58 45.87,19.35 48.16,19.35 48.46,19.05 48.46,14.94 50.22,13.18 50.22,10.9 54.18,6.93 54.18,5.87 54.86,5.18 55.78,5.18 56.77,6.17 57.84,6.17 SV2.11
  Bottom 0.152: GROVE1.2 18.9,31.47 18.44,31.01 R30.1 18.44,25.6 19.05,24.99 21.11,24.99 21.72,24.38 21.72,24.08 22.71,23.09 29.18,23.09 29.49,22.78 v29.49,11.58
I2C2_SCL
  Top 0.152: JP7.1 20.12,3.81 19.36,3.05 13.95,3.05 12.95,4.04 GROVE2.1
  Bottom 0.152: R31.1 15.77,9.45 13.41,9.45 C7.2 13.41,9.37 13.41,4.57 GROVE2.1 | JP7.1 25.91,5.56 25.91,6.1 30.02,10.21 30.02,20.5 37.57,28.04 SV1.28
I2C2_SDA
  Top 0.152: JP7.2 24.16,7.54 36.2,19.58 36.96,19.58 40.08,22.71 40.08,28.88 SV1.26
  Bottom 0.152: 17.79,6.9 15.01,4.11 GROVE2.2 | 17.79,6.9 17.83,6.93 17.83,9.37 R32.1 | JP7.2 24.16,6.4 21.49,6.4 21.03,6.86 17.83,6.86 17.79,6.9
LED1
  Top 0.152: R3.2 93.65,33.3 93.65,28.04 94.41,27.28 94.41,24.92 95.17,24.16 95.17,18.44 89.15,12.42 74.07,12.42 68.89,7.24 67.67,7.24 66.52,6.1 66.52,4.65 65.53,3.66 SV2.6
LED2  (via drill 0.3)
  Top 0.152: v84.96,26.67 81.69,29.95 81.69,33.99 81.84,34.14 83.29,34.14 84.05,33.38 84.89,33.38 R2.2 | v85.88,11.89 74.37,11.89 69.11,6.63 69.11,5.79 v68.2,4.88
  Bottom 0.152: v84.96,26.67 84.96,12.8 v85.88,11.89 | v68.2,4.88 64.24,4.88 63.02,3.66 SV2.8
LED3
  Top 0.152: R1.2 75.82,33.15 75.82,25.98 73.3,23.47 73.3,21.79 70.71,19.2 70.18,19.2 61.49,10.52 61.49,4.65 60.5,3.66 SV2.10
MODEM_D+
  Bottom 0.152: U2.12 63.55,20.88 68.05,20.88 71.93,16.99 71.93,16.38 72.47,15.85 73.84,15.85 76.28,18.29 77.65,18.29 U1.27
MODEM_D-  (via drill 0.3)
  Top 0.152: v64.69,19.2 64.69,15.85 v65.38,15.16 | v67.28,14.63 69.27,14.63 72.47,17.83 v75.06,17.83
  Bottom 0.152: v64.69,19.2 64.69,19.43 64.01,20.12 63.55,20.12 U2.11 | v65.38,15.16 66.75,15.16 v67.28,14.63 | v75.06,17.83 75.36,17.83 76.89,19.35 77.65,19.35 U1.28
N$1  (via drill 0.3)
  Top 0.152: C6.1 88.54,26.44 88.24,26.14 83.82,26.14 83.06,25.37 83.06,25.07 CR2.6 82.98,24.99 v82.98,23.85 | v81.99,20.42 90.07,20.42 SIMCARD.C1
  Bottom 0.152: U1.30 77.72,21.34 78.26,21.34 79.17,20.42 v81.99,20.42 82.22,20.42 82.98,21.18 v82.98,23.85
N$2  (via drill 0.3)
  Top 0.152: SIMCARD.C2 90.14,17.83 90.91,18.59 90.91,20.8 90.68,21.03 85.95,21.03 84.96,22.02 CR2.3 85.04,21.87 84.35,21.18 v82.22,21.18
  Bottom 0.152: v82.22,21.18 79.1,24.31 77.72,24.31 U1.33
N$3
  Bottom 0.152: R5.1 44.65,11.58 42.67,11.58 R4.2 42.6,11.58 41.99,11.58 39.7,13.87 32.31,13.87 POWER_SUPPLY.5
N$4  (via drill 0.3)
  Top 0.152: 81.5,21.22 82.3,22.02 82.98,22.02 CR2.1 | 81.5,21.22 81.46,21.18 81.46,20.19 84.43,17.22 90.68,17.22 90.91,16.99 90.91,16.08 90.14,15.32 SIMCARD.C3 | v81.38,21.26 81.46,21.26 81.5,21.22
  Bottom 0.152: v81.38,21.26 79.32,23.32 77.72,23.32 U1.32
N$5
  Top 0.152: R1.1 77.65,33.22 79.55,33.22 D3.A
N$7
  Top 0.152: R2.1 86.72,33.3 88.54,33.3 D2.A
N$8
  Top 0.152: R3.1 95.48,33.3 97.16,33.3 D1.A
N$9
  Bottom 0.152: TP1.TP 94.18,1.37 94.18,3.43 92.73,4.88 92.73,5.33 U1.6
N$10
  Bottom 0.152: R7.2 50.37,16.76 52.12,15.01 R25.1 52.2,15.01 53.11,15.93 54.86,15.93 55.02,16.08 56.01,16.08 56.16,15.93 57.38,15.93 58.22,16.76 63.02,16.76 66.45,20.19 68.2,20.19 70.56,17.83 70.56,17.07 U2.1
N$11
  Bottom 0.152: R27.2 109.35,12.12 109.35,13.79 C14.1 109.27,13.87 109.27,15.54 R26.1
N$12  (via drill 0.3)
  Top 0.152: v66.75,14.02 69.42,14.02 v69.72,14.33
  Bottom 0.152: v66.75,14.02 47.62,14.02 47.17,14.48 47.17,15.47 48.01,16.31 48.01,16.76 R8.2 | v69.72,14.33 69.72,16.99 U2.2
N$13
  Top 0.152: U3.8 73.23,6.48 73.23,4.8 74.22,3.81 X1.2
N$14  (via drill 0.3)
  Top 0.152: v55.78,15.54 55.78,17.68 v57.53,19.43 | v59.36,21.64 60.81,23.09 CR1.2
  Bottom 0.152: 55.78,15.09 56.77,15.09 R9.1 | 55.78,15.09 54.41,15.09 C13.1 | v55.78,15.54 55.78,15.09 | v57.53,19.43 58.83,20.73 58.83,21.11 v59.36,21.64
N$15
  Bottom 0.152: C16.1 109.19,22.86 109.19,24.61 108.36,25.45 108.36,27.58 J3.3
N$16  (via drill 0.3)
  Top 0.152: v14.71,15.32 14.71,18.14 12.34,20.5 12.34,31.17 15.62,34.44 69.04,34.44 71.7,31.78 71.7,26.37 71.4,26.06 67.28,26.06 v66.6,26.75
  Bottom 0.152: v14.71,15.32 15.77,15.32 R22.1 | v66.6,26.75 66.6,25.6 U2.19
N$18
  Bottom 0.152: R17.1 46.94,9.91 48.62,9.91 R18.2 48.69,9.98 49.53,10.82 53.42,10.82 54.41,9.83 T1.1
N$19  (via drill 0.3)
  Top 0.152: v16.61,26.37 19.28,26.37 23.16,30.25 45.26,30.25 46.71,28.8 46.71,28.5 49.15,26.06 54.41,26.06 v54.86,26.52
  Bottom 0.152: v16.61,26.37 16,25.76 16,25.53 R19.2 | v54.86,26.52 59.82,26.52 63.02,23.32 U2.15
N$20  (via drill 0.3)
  Top 0.152: v15.77,33.83 27.89,33.83 28.19,34.14 66.75,34.14 69.57,31.32 69.57,28.19 v71.17,26.59
  Bottom 0.152: v15.77,33.83 13.87,31.93 13.87,26.21 15.24,24.84 16.15,24.84 16.76,24.23 16.76,23.16 15.93,22.33 15.93,22.17 R20.2 | v71.17,26.59 71.17,24.92 70.41,24.16 63.55,24.16 U2.16
N$21
  Bottom 0.152: TP21.TP 91.59,5.26 91.67,5.33 U1.7
N$22  (via drill 0.3)
  Top 0.152: v14.78,18.82 14.78,22.63 12.65,24.77 12.65,25.22 17.91,30.48 22.94,30.48 23.01,30.56 25.38,30.56 26.36,31.55 26.36,31.85 28.35,33.83 64.54,33.83 67.06,31.32 67.06,27.05 v67.36,26.75
  Bottom 0.152: v14.78,18.82 14.94,18.67 15.85,18.67 R21.1 | v67.36,26.75 67.36,25.6 U2.20
N$23
  Bottom 0.152: C8.1 56.84,12.04 53.8,12.04 T1.3 53.72,12.04 53.03,12.73 46.63,12.73 46.1,12.19 46.1,11.66 45.34,10.9 44.42,10.9 43.81,10.29 43.81,6.1 44.73,5.18 45.11,5.18 46.25,4.04 46.25,3.66 47.32,2.59 71.02,2.59 74.37,5.94 78.56,5.94 84.2,11.58 85.42,11.58 87.55,9.45 98.45,9.45 99.06,8.84 99.06,6.48 97.99,5.41 97.77,5.41 U1.1
N$27
  Bottom 0.152: L1.1 109.27,21.18 109.27,19.2 R39.1
N$29  (via drill 0.3)
  Top 0.152: v102.72,26.37 104.09,26.37 R28.2
  Bottom 0.152: v102.72,26.37 101.73,25.37 U1.52
N$30
  Top 0.152: D4.A 105.84,26.44 R28.1
N$32
  Bottom 0.152: TP22.TP 89.15,1.3 89.15,3.28 90.68,4.8 90.68,5.33 U1.8
N$33  (via drill 0.3)
  Top 0.152: v103.1,9.91 104.17,8.84 R33.2
  Bottom 0.152: v103.1,9.91 103.1,10.44 102.18,11.35 U1.66
N$35
  Bottom 0.152: J2.3 108.43,7.32 108.43,11.28 107.67,12.04 R27.1
N$36  (via drill 0.3)
  Top 0.152: v63.32,8.69 69.88,8.69 74.07,12.88 88.85,12.88 v88.92,12.95 | v91.9,9.98 91.9,9.53 v93.8,7.62
  Bottom 0.152: R11.2 58.98,10.06 60.5,10.06 T2.2 60.58,10.06 60.96,10.06 62.33,8.69 v63.32,8.69 | v91.9,9.98 v88.92,12.95 | v93.8,7.62 93.95,7.62 95.71,5.87 95.71,5.41 U1.3
N$37
  Top 0.152: D5.A 107.52,8.99 106.15,8.99 105.99,8.84 R33.1
N$38
  Top 0.152: U3.1 75.89,6.48 75.89,4.8 75.29,4.19 75.29,2.67 76.2,1.75 X1.3
NRESET  (via drill 0.3)
  Top 0.152: v84.43,11.05 79.86,11.05 78.56,9.75 78.11,9.75 R10.1 | v81.61,3.66 82.83,2.44 RESET.1
  Bottom 0.152: v84.43,11.05 84.12,11.05 78.72,5.64 76.73,5.64 75.29,4.19 75.29,3.35 75.89,2.74 80.62,2.74 81.57,3.7 | 81.57,3.7 82.68,4.8 82.68,5.33 U1.16 | v81.61,3.66 81.57,3.7
OUT2  (via drill 0.3)
  Top 0.152: v50.22,22.86 49.53,22.86 46.41,19.74 v45.49,19.74 | v38.48,21.87 16.31,21.87 v13.18,24.99
  Bottom 0.152: J1.1 8.31,20.73 10.52,22.94 10.52,23.39 12.5,25.37 TP3.TP 12.5,25.3 12.8,24.99 v13.18,24.99 | v50.22,22.86 51.21,22.86 52.27,23.93 52.27,26.14 52.58,26.44 53.34,26.44 54.18,25.6 54.18,25.15 U4.14 | v45.49,19.74 40.62,19.74 v38.48,21.87
OUT3  (via drill 0.3)
  Top 0.152: v50.98,26.59 50.98,26.75 48.77,28.96 48.77,29.26 47.62,30.4 47.32,30.4 v46.48,31.24
  Bottom 0.152: 10.17,30.9 9.6,31.47 7.32,31.47 6.71,30.86 6.71,28.58 7.54,27.74 7.54,25.83 5.56,23.85 5.56,20.73 J1.5 | 10.17,30.9 10.21,30.86 10.21,29.95 9.3,29.03 9.3,26.67 TP4.TP | v50.98,26.59 50.44,26.06 50.44,25.15 U4.11 | v46.48,31.24 46.48,31.55 43.66,34.37 13.64,34.37 10.17,30.9
OUT4
  Bottom 0.152: U4.10 49.15,25.15 49.15,25.6 48.31,26.44 46.71,26.44 45.64,25.37 JP5.1
OVRCUR1  (via drill 0.3)
  Top 0.152: v57.99,13.49 57.99,17.3 57.53,17.75 57.53,18.21 v58.6,19.28 | v57.53,25.15 57.53,24.84 57,24.31 57,22.02 58.14,20.88 v59.36,20.88
  Bottom 0.152: v57.99,13.49 47.7,13.49 46.18,15.01 45.87,15.01 R35.1 | 59.36,19.28 63.48,19.28 U2.10 | 59.36,19.28 v58.6,19.28 | v57.53,25.15 56.84,25.15 U4.16 | 59.36,19.28 v59.36,20.88
OVRCUR2  (via drill 0.3)
  Top 0.152: v41.38,31.62 42.22,32.46 55.78,32.46 56.39,31.85 56.39,26.37 v53.65,23.62
  Bottom 0.152: v41.38,31.62 41.38,28.73 37.95,25.3 37.95,16.54 38.33,16.15 41.6,16.15 42.75,15.01 43.43,15.01 R34.1 | U4.13 53.03,25.07 53.65,24.46 v53.65,23.62 58.6,23.62 59.66,22.56 63.48,22.56 U2.14
OVRCUR3  (via drill 0.3)
  Top 0.152: v38.86,31.62 40.01,32.77 60.5,32.77 61.95,31.32 61.95,31.01 63.02,29.95 63.32,29.95 64.01,29.26 v64.01,27.97
  Bottom 0.152: v38.86,31.62 38.86,28.73 37.64,27.51 37.64,16.38 38.18,15.85 40.08,15.85 40.84,15.09 41.3,15.09 R37.2 | v64.01,27.97 65.76,26.21 65.76,25.6 U2.18 65.76,25.53 65.76,25.07 65.3,24.61 64.69,24.61 62.26,27.05 52.73,27.05 51.74,26.06 51.74,25.15 U4.12
OVRCUR4  (via drill 0.3)
  Top 0.152: v40.08,15.09 v46.25,21.26 46.18,21.26 v43.81,23.62 | v66.22,27.81 64.62,27.81 64.24,27.43 63.02,27.43 61.49,28.96 61.49,29.57 v61.11,29.95 | v51.05,29.87 50.75,29.87 50.67,29.95 v48.84,29.95
  Bottom 0.152: v40.08,15.09 39.01,15.09 R36.2 | v46.25,21.26 46.25,23.47 47.85,25.07 U4.9 | v66.22,27.81 67.51,27.81 68.96,26.37 68.96,25.6 U2.22 | v61.11,29.95 51.13,29.95 v51.05,29.87 | v48.84,29.95 47.32,29.95 46.25,28.88 46.25,28.35 43.81,25.91 v43.81,23.62
PB2  (via drill 0.3)
  Top 0.152: 89.23,9.53 90.37,9.53 91.14,8.76 BTN2.2 | 89.23,9.53 88.01,9.53 R14.2 | 89.23,9.53 89.23,6.63 v83.74,1.14 | v55.47,2.06 53.87,3.66 53.87,4.04 52.73,5.18 51.28,5.18 50.29,6.17 SV2.17
  Bottom 0.152: v83.74,1.14 76.96,1.14 76.58,0.76 56.77,0.76 v55.47,2.06
PB3
  Top 0.152: BTN3.2 99.75,8.76 98.98,9.53 95.94,9.53 R16.2 95.94,9.45 95.94,8.99 87.55,0.61 51.82,0.61 49.23,3.2 49.23,3.58 47.78,5.03 47.78,6.17 SV2.19
PRE_ANT
  Bottom 0.152: R26.2 107.52,15.62 C15.1 107.44,17.3 101.73,17.3 U1.60
PRE_GPS
  Bottom 0.152: L1.2 107.52,21.26 107.52,22.78 C16.2 107.44,22.86 106.3,24 105.08,24 TP2.TP 105,24.08 104.78,24.31 101.73,24.31 U1.53
PWRKEY  (via drill 0.3)
  Top 0.152: v49.68,12.04 49.68,10.74 53.87,6.55 53.87,5.72 54.94,4.65 58.29,4.65 59.44,3.51 59.44,3.2 60.05,2.59 65.91,2.59 67.06,3.73 67.06,5.18 SV2.3
  Bottom 0.152: v49.68,12.04 49.3,12.42 48.08,12.42 47.24,11.58 46.94,11.58 R17.2
PWRON1
  Bottom 0.152: U2.9 63.48,18.52 55.85,18.52 55.63,18.29 55.17,18.29 54.25,19.2 54.25,20.35 U4.3
PWRON2
  Bottom 0.152: U2.13 63.48,21.79 59.97,21.79 58.98,22.78 54.48,22.78 53.03,21.34 53.03,20.42 U4.4
PWRON3
  Bottom 0.152: U2.17 64.92,25.6 64.16,25.6 62.41,27.36 50.98,27.36 49.68,26.06 49.68,21.79 49.23,21.34 49.23,20.42 U4.7
PWRON4  (via drill 0.3)
  Top 0.152: v64.01,32.16 63.7,32.16 62.56,33.3 v41.91,33.3 | v43.66,26.52 43.66,24.61 v47.09,21.18
  Bottom 0.152: v64.01,32.16 64.01,28.96 65.68,27.28 67.59,27.28 68.12,26.75 68.12,25.6 U2.21 | v41.91,33.3 42.22,33.3 43.66,31.85 v43.66,26.52 | v47.09,21.18 47.85,20.42 U4.8
REGULATED  (via drill 0.3)
  Top 0.152: v44.65,8.92 44.65,9.14 v43.2,10.59 43.28,10.59 43.28,14.17 v47.93,18.82 | v103.02,20.88 97.92,25.98 97.92,26.44 C3.1 97.84,26.52 95.33,26.52 C5.1 95.33,26.59 95.33,26.82 94.18,27.97 v94.18,30.71
  Bottom 0.152: POWER_SUPPLY.4 32.23,15.62 32,15.62 30.94,14.55 30.94,13.26 31.09,13.11 38.48,13.11 40.01,11.58 40.62,11.58 R6.2 40.69,11.51 41.6,10.59 v43.2,10.59 | v44.65,8.92 44.65,9.75 R5.2 | 103.02,20.57 101.88,20.57 101.73,20.42 U1.57 101.73,20.5 101.73,21.34 U1.56 101.73,21.41 101.73,22.33 U1.55 | 103.02,20.57 104.47,20.57 TP5.TP 104.55,20.57 105.92,19.2 R39.2 | 103.02,20.57 v103.02,20.88 | v47.93,18.82 47.7,18.82 44.65,21.87 44.65,25.83 46.41,27.58 50.75,27.58 51.05,27.89 60.88,27.89 61.95,28.96 61.95,31.85 62.87,32.77 92.13,32.77 v94.18,30.71
RESET
  Bottom 0.152: R38.2 64.39,10.21 64.92,10.21 C17.1 66.45,11.81 68.12,13.49 68.12,15.16 | 68.12,15.16 68.12,16.99 U2.4 | 68.12,15.16 67.21,15.16 66.67,15.7 60.96,15.7 JP4.1
RXD  (via drill 0.3)
  Top 0.152: v84.51,7.7 82.45,7.7 81.69,8.46 75.97,8.46 U3.4
  Bottom 0.152: v84.51,7.7 86.87,7.7 88.7,5.87 88.7,5.41 U1.10
SIM_DATA
  Top 0.152: 80.89,21.53 82.68,23.32 83.52,23.32 84.89,24.69 84.89,24.99 CR2.4 | 80.89,21.53 80.85,21.49 80.85,20.35 84.58,16.61 90.07,16.61 SIMCARD.C7 | 80.89,21.53 79.25,23.16 74.45,23.16 JP10.1
  Bottom 0.152: U1.31 77.65,22.4 75.21,22.4 74.45,23.16 JP10.1
SIMC_ADC
  Bottom 0.152: JP9.1 75.74,16.31 77.65,16.31 U1.25
SIMC_I2C_SCL
  Bottom 0.152: TP7.TP 78.87,30.78 81.23,30.78 81.38,30.94 83.67,30.94 84.66,29.95 84.66,29.41 U1.38
SIMC_I2C_SDA
  Bottom 0.152: TP8.TP 78.26,30.25 78.56,29.95 80.85,29.95 81.53,30.63 82.91,30.63 83.67,29.87 83.67,29.41 U1.37
SLEEP
  Bottom 0.152: T2.1 62.48,10.06 62.71,10.06 65.53,7.24 68.43,7.24 69.57,6.1 69.57,4.65 70.56,3.66 SV2.2
SUSPEND
  Bottom 0.152: JP3.1 72.08,17.68 72.08,18.52 U2.32
TXD  (via drill 0.3)
  Top 0.152: v85.19,11.05 84.66,11.58 77.19,11.58 74.14,8.53 73.23,8.53 U3.5 | v87.02,9.22 87.02,8.53 v88.7,6.86
  Bottom 0.152: v87.02,9.22 v85.19,11.05 | v88.7,6.86 89.69,5.87 89.69,5.41 U1.9
USB1_D+
  Bottom 0.152: 12.88,19.74 12.72,19.74 11.89,20.57 R24.2 | 12.88,19.74 14.1,19.74 14.63,20.27 15.85,20.27 R20.1 | 12.88,19.74 12.88,17.3 14.17,16 14.17,15.09 15.16,14.1 16.54,14.1 16.69,13.94 16.69,12.95 16.54,12.8 11.66,12.8 11.62,12.84 | 11.62,12.84 8.31,16.15 J1.3 | JP6.2 9.3,2.29 9.3,2.59 11.58,4.88 11.58,12.8 11.62,12.84
USB1_D-
  Top 0.152: JP6.1 9.3,4.8 9.3,8.53 10.52,9.75 10.52,15.93 8.31,18.14 J1.2
  Bottom 0.152: R19.1 15.93,23.7 15.32,24.31 13.26,24.31 12.5,23.55 12.04,23.55 R23.2 11.96,23.47 11.96,22.63 8.31,18.97 8.31,18.21 J1.2
USB2_D+  (via drill 0.3)
  Top 0.152: 8.72,19.09 8.69,19.13 7.85,19.13 5.56,16.84 5.56,16.23 J1.7 | 8.72,19.09 v9.75,18.06 10.9,16.92 v14.02,16.92 | JP2.2 8.46,32.61 10.52,30.56 10.52,20.88 8.72,19.09
  Bottom 0.152: v9.75,18.06 11.73,18.06 R13.2 | v14.02,16.92 15.85,16.92 R21.2
USB2_D-
  Bottom 0.152: R22.2 15.77,13.49 13.49,13.49 11.73,15.24 R15.2 11.66,15.32 9.83,17.15 7.92,17.15 6.93,18.14 6.71,18.14 | 6.71,18.14 5.56,18.14 J1.6 | JP2.1 8.46,26.29 6.71,24.54 6.71,18.14
USB_VBUS  (via drill 0.3)
  Top 0.152: v76.28,15.09 76.28,15.39 76.5,15.62 76.5,20.12 v75.74,20.88 | SV1.7 63.02,31.47 65.46,31.47 SV1.5
  Bottom 0.152: v76.28,15.09 76.5,15.32 77.65,15.32 U1.24 | v75.74,20.88 75.29,20.88 73,23.16 73,25.22 72.39,25.83 72.39,26.29 73.69,27.58 75.29,27.58 76.05,28.35 76.05,29.87 75.74,30.18 75.74,31.93 75.21,32.46 66.52,32.46 65.53,31.47 SV1.5
XTAL1  (via drill 0.3)
  Top 0.152: v73.23,20.5 74.68,20.5 C12.1 | v70.87,20.12 70.87,22.56 70.33,23.09 CR1.1
  Bottom 0.152: v73.23,20.5 72.92,20.5 72.62,20.19 72.08,20.19 U2.30 72.01,20.12 v70.87,20.12
XTAL2  (via drill 0.3)
  Top 0.152: v58.06,17.98 62.71,17.98 64.47,19.74 67.13,19.74 67.74,19.13 69.11,19.13 v70.1,20.12
  Bottom 0.152: v58.06,17.98 56.84,16.76 R9.2 | v70.1,20.12 70.87,20.88 72.01,20.88 U2.29

## Text on the board
tPlace: Janak Patel | Liza Chevalier | Arthur Brazzle | Alex Minser | NCSU ECE Senior Design 2020